# EAGLE board Power Board rev3 (EAGLE 8.1.0)
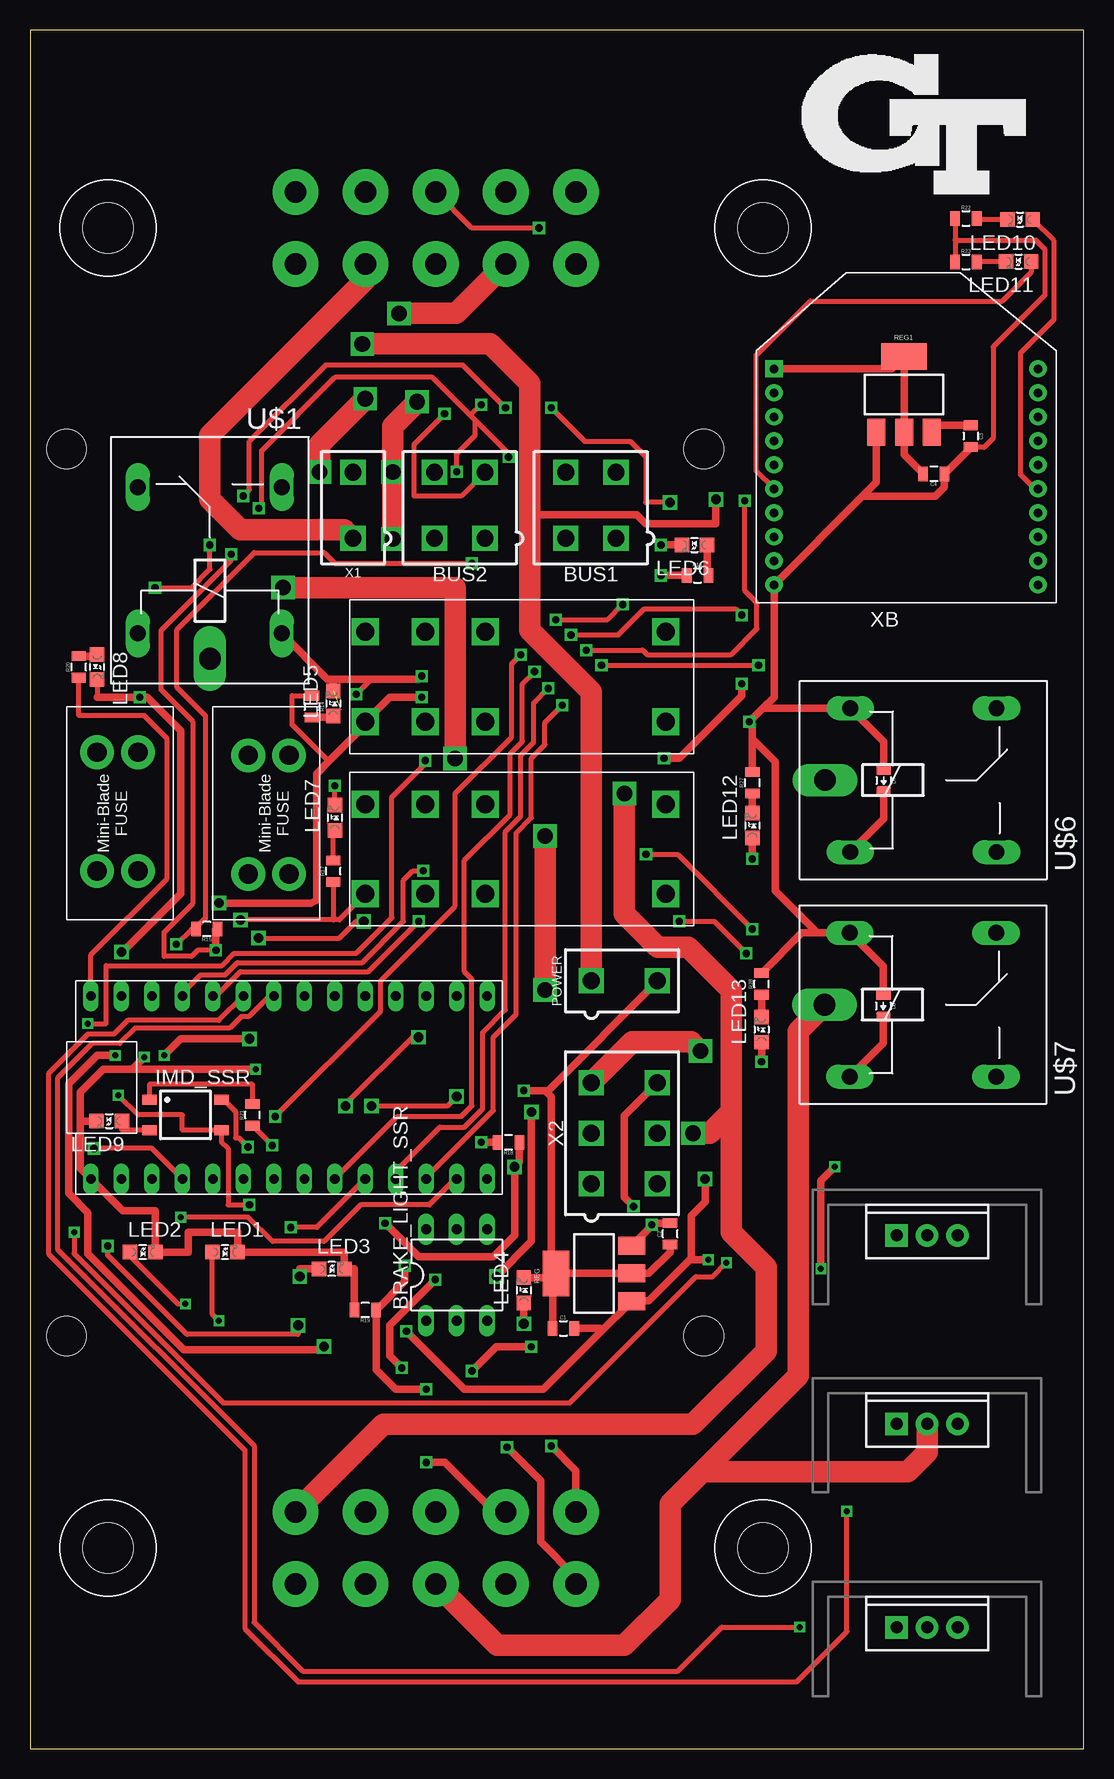
[diagram p0: board, top side]
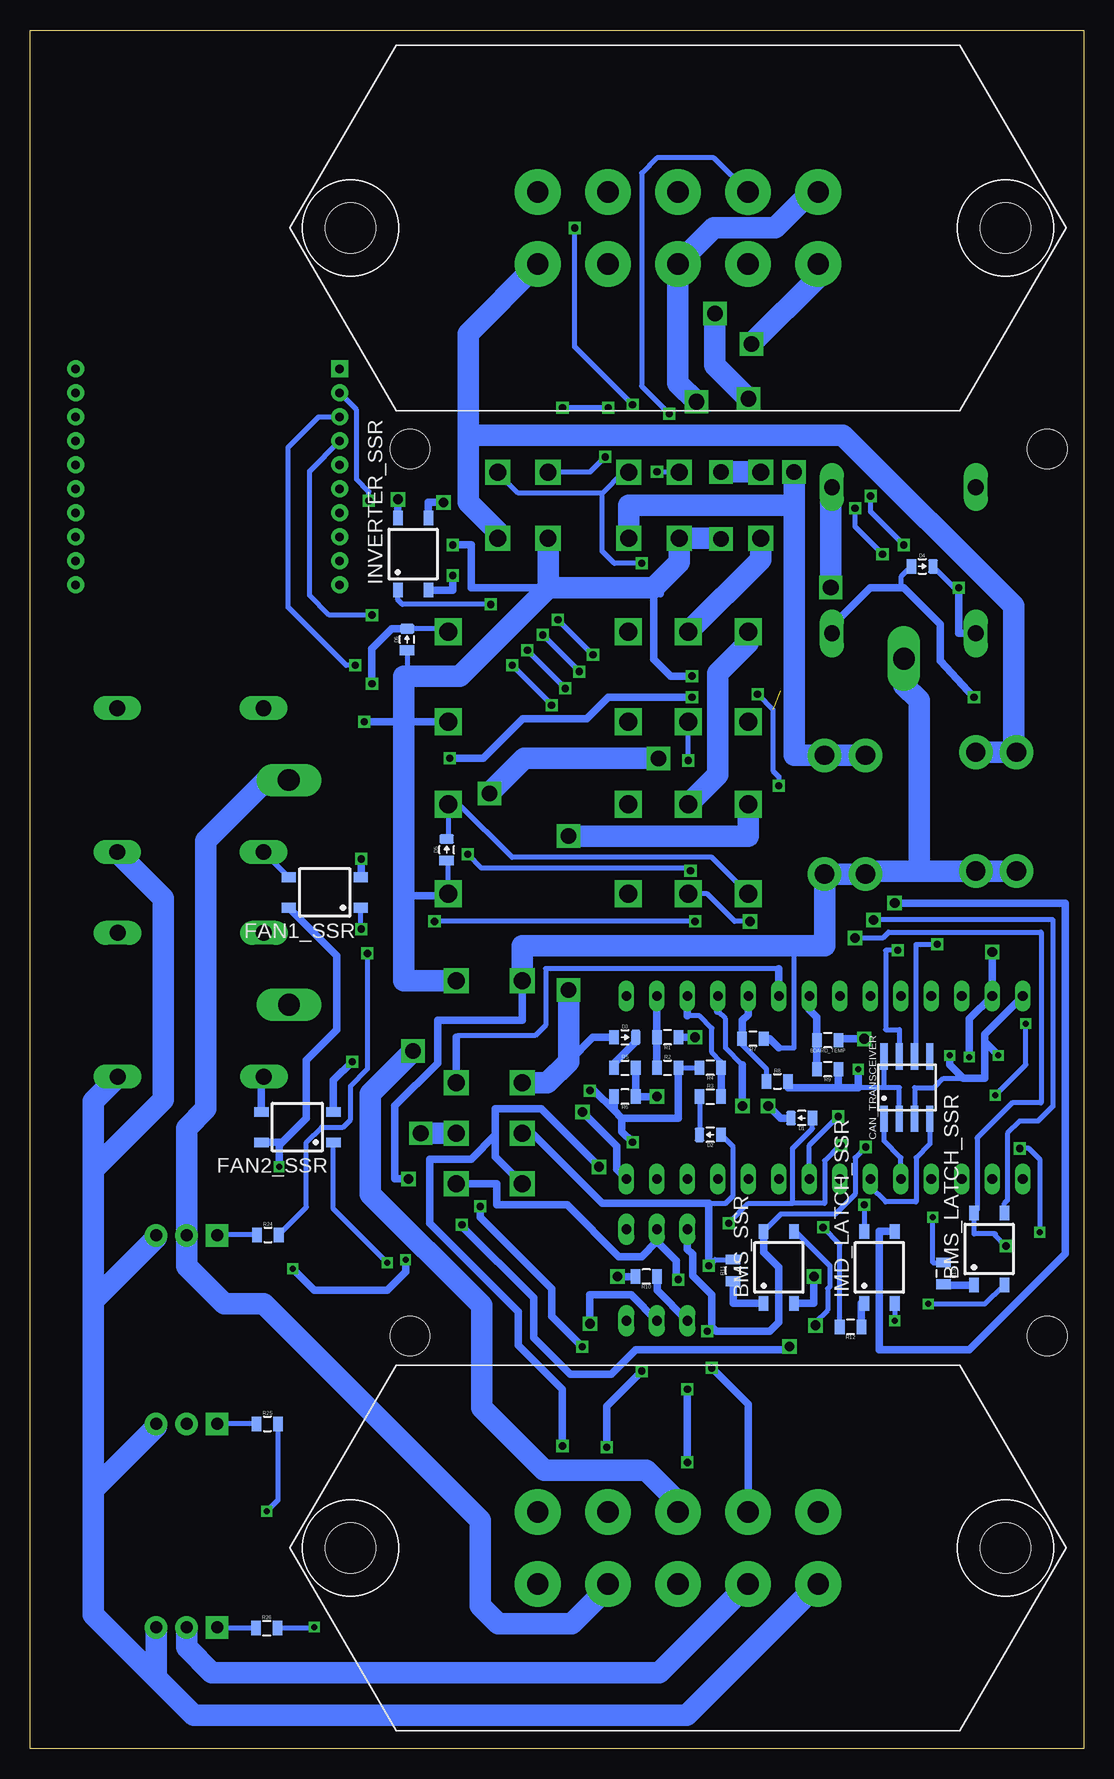
[diagram p1: board, bottom side, seen from below]

Size 87.81 x 143.25 mm. Coordinates in mm from the lower left corner, seen from the top.
Outline: 0,0 87.81,0 87.81,143.25 0,143.25 0,0
Copper layers (1*16): Top 0.035mm / dielectric 1.5mm / Bottom 0.035mm
Design rules "default *": minimum track width 10mil, minimum drill 12mil, track to track 8mil, track to pad 8mil, pad to pad 8mil, via to via 8mil, smd to smd 8mil, copper to edge 40mil, drill to drill 8mil, minimum pad ring 10mil, minimum via ring 8mil, stop-mask expansion 4mil, vias tented up to drill 0mil, thermal gap 10mil
Holes 3.3 mm at 3.05,108.33 56.13,108.33 3.05,34.42 56.13,34.42

## Footprints (pad centres in the part's own frame; a part is rotated, then mirrored left to right if it is on the bottom)
SOP04 = smd 0.8 x 1.2: 1 -1.27,-3; 2 1.27,-3; 3 1.27,3; 4 -1.27,3
0805 = smd 0.8 x 1.2: 1 -0.9,0; 2 0.9,0
DIL06 = drill 0.813 long: 1 -2.54,-3.81; 2 0,-3.81; 3 2.54,-3.81; 4 2.54,3.81; 5 0,3.81; 6 -2.54,3.81
MINIFIT_5566-4 = drill 1.4 square: 1 2.1,-2.75; 2 -2.1,-2.75; 3 2.1,2.75; 4 -2.1,2.75
SOIC-08 = smd 0.6 x 2.2: 1 -1.905,-2.6; 2 -0.635,-2.6; 3 0.635,-2.6; 4 1.905,-2.6; 5 1.905,2.6; 6 0.635,2.6; 7 -0.635,2.6; 8 -1.905,2.6
0805_D = smd 0.8 x 1.2: A -0.9,0; C 0.9,0
MINI-BLADE_FUSE_HOLDER = drill 1.613 pad 2.794: L1 0,3.404; L2 0,0; R1 9.906,3.404; R2 9.906,0
G2RL-2 = drill 1.5 square: 2 10.008,0; 3 5.004,0; 4 0,0; 5 0,7.493; 6 5.004,7.493; 7 10.008,7.493; COIL+ 25.019,0; COIL- 25.019,7.493
LED-805 = smd 1.2 x 1.2: A 0,-1.05; C 0,1.05
MINIFIT_5566-2 = drill 1.4 square: 1 0,-2.75; 2 0,2.75
SOT223 = smd 1.5 x 2.235: 1 -2.3,-3.15; 2 0,-3.15; 3 2.3,-3.15 | smd 3.8 x 2.2: 4 0,3.15
ZF112 = drill 1.321 long: 1 4.064,14.884; 2 4.064,2.896; O 16.256,14.884; S 16.256,2.896 | drill 1.803 long: P 1.956,8.89
TO-220-SINK = drill 1 pad 1.88 square: 1 -2.54,0 | drill 1 pad 1.88: 2 0,0; 3 2.54,0
TEENSY_3.2_SIMPLE = drill 0.8 long: 3.3V 16.51,29.21; A0 16.51,3.81; A1 16.51,6.35; A2 16.51,8.89; A3 16.51,11.43; A4 16.51,13.97; A5 16.51,16.51; A6 16.51,19.05; A7 16.51,21.59; A8 16.51,24.13; A9 16.51,26.67; AGND 16.51,31.75; D0(RX1) 1.27,31.75; D1(TX1) 1.27,29.21; D2 1.27,26.67; D3(CANTX) 1.27,24.13; D4(CANRX) 1.27,21.59; D5 1.27,19.05; D6 1.27,16.51; D7(RX3) 1.27,13.97; D8(TX3) 1.27,11.43; D9(RX2) 1.27,8.89; D10(TX2) 1.27,6.35; D11 1.27,3.81; D12 1.27,1.27; D13 16.51,1.27; GND 1.27,34.29; VIN 16.51,34.29
MINIFIT_5566-6 = drill 1.4 square: 1 4.2,-2.75; 2 0,-2.75; 3 -4.2,-2.75; 4 4.2,2.75; 5 0,2.75; 6 -4.2,2.75
MX150L_VERTICAL-10 = drill 1.778 pad 3.81: 1 -11.684,2.997; 2 -5.842,2.997; 3 0,2.997; 4 5.842,2.997; 5 11.684,2.997; 6 -11.684,-2.997; 7 -5.842,-2.997; 8 0,-2.997; 9 5.842,-2.997; 10 11.684,-2.997 | hole 4.191: -27.292,0; 27.292,0
XBEE = drill 0.7 pad 1.422 square: 1 -11,5.5 | drill 0.7 pad 1.422: 2 -11,3.5; 3 -11,1.5; 4 -11,-0.5; 5 -11,-2.5; 6 -11,-4.5; 7 -11,-6.5; 8 -11,-8.5; 9 -11,-10.5; 10 -11,-12.5; 11 11,-12.5; 12 11,-10.5; 13 11,-8.5; 14 11,-6.5; 15 11,-4.5; 16 11,-2.5; 17 11,-0.5; 18 11,1.5; 19 11,3.5; 20 11,5.5

## Placement (x,y rotation side)
BMS_LATCH_SSR  CPC1002N  [SOP04]  7.87,41.66 0 bottom
BMS_SSR  CPC1002N  [SOP04]  25.4,40.13 0 bottom
BOARD_TEMP  THERMISTOR_NCP21  [0805]  21.34,59.05 180 bottom
BRAKE_LIGHT_SSR  SOLID_STATE_RELAY_VO14642AT  [DIL06]  35.56,39.5 0 top
BUS1  CONNECTOR-4  [MINIFIT_5566-4]  46.74,103.63 0 top
BUS2  CONNECTOR-4  [MINIFIT_5566-4]  35.81,103.63 0 top
C1  .22uF  [0805]  44.45,35.05 0 top
C2  .1uF  [0805]  53.34,42.93 90 top
C3  1uF  [0805]  78.4,109.41 270 top
C4  1uF  [0805]  75.32,106.26 180 top
CAN_TRANSCEIVER  MCP2551  [SOIC-08]  14.73,55.12 0 bottom
D1  DIODE0805  [0805_D]  23.5,52.58 180 bottom
D2  DIODE0805  [0805_D]  31.11,51.18 180 bottom
D3  DIODE0805  [0805_D]  38.23,59.31 0 bottom
D4  DIODE0805  [0805_D]  13.46,98.55 0 bottom
D5  DIODE0805  [0805_D]  53.09,74.93 90 bottom
D6  DIODE0805  [0805_D]  56.39,92.46 90 bottom
D7  DIODE0805  [0805_D]  71.14,80.7 270 top
D8  DIODE0805  [0805_D]  71.11,61.92 270 top
FAN1_SSR  CPC1002N  [SOP04]  63.25,71.37 90 bottom
FAN2_SSR  CPC1002N  [SOP04]  65.53,51.82 90 bottom
FUSE_BUS_1  5A  [MINI-BLADE_FUSE_HOLDER]  5.59,83.06 270 top
FUSE_BUS_2  5A  [MINI-BLADE_FUSE_HOLDER]  21.59,72.9 90 top
IMD_LATCH_SSR  CPC1002N  [SOP04]  17.02,40.13 0 bottom
IMD_SHUTDOWN  G2RL-2-DC12  [G2RL-2]  27.94,85.6 0 top
IMD_SHUTDOWN1  G2RL-2-DC12  [G2RL-2]  27.94,71.25 0 top
IMD_SSR  CPC1002N  [SOP04]  12.95,52.83 270 top
INVERTER_SSR  CPC1002N  [SOP04]  55.88,99.57 0 bottom
LED1  [LED-805]  16.26,41.4 270 top
LED2  [LED-805]  9.4,41.4 270 top
LED3  [LED-805]  25.15,40.01 270 top
LED4  [LED-805]  41.15,38.23 0 top
LED5  [LED-805]  25.27,87.12 0 top
LED6  [LED-805]  55.37,100.33 90 top
LED7  [LED-805]  25.4,77.6 0 top
LED8  [LED-805]  5.59,90.17 180 top
LED9  [LED-805]  6.6,52.32 90 top
LED10  [LED-805]  82.51,127.45 90 top
LED11  [LED-805]  82.39,123.94 90 top
LED12  [LED-805]  60.2,76.96 0 top
LED13  [LED-805]  60.96,59.94 0 top
POWER  CONNECTOR-2  [MINIFIT_5566-2]  49.53,64.01 270 top
R1  43k  [0805]  34.67,59.31 180 bottom
R2  12k  [0805]  34.67,56.77 0 bottom
R3  43k  [0805]  31.11,54.36 0 bottom
R4  12k  [0805]  31.11,56.77 180 bottom
R5  43k  [0805]  38.23,56.77 0 bottom
R6  12k  [0805]  38.23,54.36 180 bottom
R7  43k  [0805]  27.56,59.18 180 bottom
R8  12k  [0805]  25.53,55.63 0 bottom
R9  10k  [0805]  21.34,56.64 180 bottom
R10  100  [0805]  36.45,39.37 180 bottom
R11  100  [0805]  29.21,39.88 90 bottom
R12  100  [0805]  19.43,35.18 180 bottom
R13  100  [0805]  11.68,39.62 270 bottom
R14  820  [0805]  23.5,86.87 270 top
R15  120  [0805]  14.73,68.33 180 top
R16  100  [0805]  55.63,97.79 0 top
R17  820  [0805]  25.27,73.15 90 top
R18  2.2k  [0805]  39.88,50.55 180 top
R19  10k  [0805]  27.94,36.58 180 top
R20  270  [0805]  4.06,90.17 90 top
R21  680  [0805]  18.54,52.83 90 top
R22  [0805]  78,127.54 0 top
R23  [0805]  78,123.93 0 top
R24  [0805]  67.98,42.84 0 bottom
R25  [0805]  68.03,27.09 0 bottom
R26  [0805]  68.08,10.07 0 bottom
R27  [0805]  60.2,80.52 90 top
R28  [0805]  60.96,63.75 90 top
REG  5V  [SOT223]  46.99,39.62 90 top
REG1  TLV1117LV33  [SOT223]  72.84,112.88 0 top
U$1  G5LE  [ZF112]  23.88,88.9 90 top
U$2  N-CHANNEL_MOSFETGENERIC  [TO-220-SINK]  74.76,42.79 0 top
U$3  TEENSY_3.2_SIMPLE  [TEENSY_3.2_SIMPLE]  39.37,46.23 90 top
U$4  N-CHANNEL_MOSFETGENERIC  [TO-220-SINK]  74.76,27.09 0 top
U$5  N-CHANNEL_MOSFETGENERIC  [TO-220-SINK]  74.76,10.13 0 top
U$6  G5LE  [ZF112]  64.29,71.85 0 top
U$7  G5LE  [ZF112]  64.25,53.13 0 top
X1  CONNECTOR-2  [MINIFIT_5566-2]  26.92,103.63 0 top
X2  CONNECTOR-6  [MINIFIT_5566-6]  49.53,51.31 270 top
X3  CONNECTOR-10MX150L_VERTICAL-10  [MX150L_VERTICAL-10]  33.81,16.75 0 bottom
X4  CONNECTOR-10MX150L_VERTICAL-10  [MX150L_VERTICAL-10]  33.81,126.75 180 bottom
XB  XBEE  [XBEE]  73,109.51 0 top

## Library data of the parts
BMS_LATCH_SSR BMS_SSR BOARD_TEMP BRAKE_LIGHT_SSR C1-C4 CAN_TRANSCEIVER D1-D8 FAN1_SSR FAN2_SSR FUSE_BUS_1 FUSE_BUS_2 IMD_LATCH_SSR IMD_SHUTDOWN IMD_SHUTDOWN1 IMD_SSR INVERTER_SSR LED1-LED13 R1-R28 REG REG1 U$1 U$3 U$6 U$7 X3 X4 XB = HyTechDevices
BUS1 BUS2 = HyTechDevices; OC_FARNELL: unknown; OC_NEWARK: unknown
POWER X1 = HyTechDevices; OC_FARNELL: 1822072; OC_NEWARK: unknown
U$2 U$4 U$5 = HyTechDevices; _EXTERNAL_: 1
X2 = HyTechDevices; MPN: 95566-61002; OC_FARNELL: unknown; OC_NEWARK: 22K8620

## Nets
12V_F1: BUS1.1 FUSE_BUS_1.L1 FUSE_BUS_1.L2 X4.5
12V_F2: BUS2.1 FUSE_BUS_2.R1 FUSE_BUS_2.R2 X4.4
12VSUPPLY_READ: R7.2 R8.1 U$3.A3
+5V: BOARD_TEMP.1 C2.2 CAN_TRANSCEIVER.3 R20.1 REG.3 U$3.VIN
+12V: BMS_SSR.4 BRAKE_LIGHT_SSR.6 C1.2 FAN1_SSR.4 FAN2_SSR.4 FUSE_BUS_1.R1 FUSE_BUS_1.R2 FUSE_BUS_2.L1 FUSE_BUS_2.L2 IMD_SSR.4 INVERTER_SSR.4 POWER.1 R7.1 REG.1 U$1.P X4.1
BMS_COIL_PWR: BMS_LATCH_SSR.3 D5.C IMD_SHUTDOWN1.4 IMD_SHUTDOWN1.COIL- R17.1
BMS_OK: D2.A R11.2 R19.1 X2.2 X3.2
BMS_OK_READ: R3.2 R4.1 U$3.A1
BMS_PWR_STEP: BMS_LATCH_SSR.4 BMS_SSR.3 IMD_SHUTDOWN1.3
BRAKE_LIGHT: BRAKE_LIGHT_SSR.5 X2.4 X3.4
CANH: BUS1.4 BUS2.4 CAN_TRANSCEIVER.7 R15.1 X4.8
CANL: BUS1.3 BUS2.3 CAN_TRANSCEIVER.6 R15.2 X4.7
FAN1-: U$2.2 U$6.P X3.7
FAN2-: U$4.2 U$7.P X3.8
FAN3-: U$5.2 X3.9
GND: BUS1.2 BUS2.2 C1.1 C2.1 C3.2 C4.1 CAN_TRANSCEIVER.2 CAN_TRANSCEIVER.8 D4.A D5.A D6.A D7.A D8.A IMD_SHUTDOWN1.COIL+ IMD_SHUTDOWN.COIL+ LED1.C LED2.C LED3.C LED4.C LED5.C LED6.C LED7.C LED8.C LED9.C POWER.2 R2.2 R4.2 R6.2 R8.2 R9.1 R18.2 R19.2 R22.1 R23.1 R27.2 R28.2 REG1.1 REG.2 REG.4 U$1.2 U$3.AGND U$3.GND U$6.1 U$7.1 X1.2 X4.3 X4.6 XB.10
GND1: U$2.3 U$4.3 U$5.3 U$6.S U$7.S X3.10
GPIO: U$3.A4 X2.6 X3.6
INVERTER_SUPPLY: U$1.S X2.5 X3.5
N$1: IMD_LATCH_SSR.2 LED1.A
N$2: CAN_TRANSCEIVER.4 U$3.D4(CANRX)
N$3: CAN_TRANSCEIVER.1 U$3.D3(CANTX)
N$4: D7.C FAN1_SSR.3 U$6.2
N$5: IMD_LATCH_SSR.1 R12.1
N$6: D6.C IMD_LATCH_SSR.3 IMD_SHUTDOWN.4 IMD_SHUTDOWN.COIL- R14.1
N$7: BRAKE_LIGHT_SSR.2 LED4.A
N$8: R12.2 U$3.D8(TX3)
N$9: BMS_SSR.2 LED3.A
N$10: LED10.A XB.15
N$11: LED10.C R22.2
N$12: BMS_LATCH_SSR.1 R13.2
N$13: R10.2 U$3.D12
N$14: R13.1 U$3.D11
N$15: BOARD_TEMP.2 R9.2 U$3.A5
N$16: BMS_LATCH_SSR.2 LED2.A
N$17: BRAKE_LIGHT_SSR.1 R10.1
N$18: BMS_SSR.1 R11.1
N$19: LED5.A R14.2
N$20: D8.C FAN2_SSR.3 U$7.2
N$21: INVERTER_SSR.1 U$3.D6
N$22: D1.C R1.1
N$23: D2.C R3.1
N$24: D3.C R5.1
N$25: LED11.A XB.6
N$26: D4.C INVERTER_SSR.3 U$1.1
N$27: INVERTER_SSR.2 R16.1
N$28: LED6.A R16.2
N$29: LED8.A R20.2
N$30: IMD_LATCH_SSR.4 IMD_SHUTDOWN.3 IMD_SSR.3
N$31: IMD_SSR.1 R21.2
N$32: LED7.A R17.2
N$33: LED11.C R23.2
N$34: IMD_SSR.2 LED9.A
N$35: C3.1 REG1.3
N$36: LED13.C R28.1
N$37: LED12.C R27.1
N$38: FAN1_SSR.2 LED12.A
N$39: R24.1 U$2.1
N$40: R25.1 U$4.1
N$41: R26.1 U$5.1
N$42: FAN2_SSR.2 LED13.A
OKHS: D1.A R18.1 R21.1 X2.1 X3.1
OKHS_READ: R1.2 R2.1 U$3.A0
PWM_CTRL1: R24.2 U$3.A8
PWM_CTRL2: R25.2 U$3.A7
PWM_CTRL3: R26.2 U$3.A6
RELAY_CTRL1: FAN1_SSR.1 U$3.A9
RELAY_CTRL2: FAN2_SSR.1 U$3.D2
SHUTDOWN_A: IMD_SHUTDOWN1.6 IMD_SHUTDOWN.5
SHUTDOWN_B: D3.A IMD_SHUTDOWN1.5 X2.3 X3.3
SHUTDOWN_OUT_READ: R5.2 R6.1 U$3.A2
SHUTDOWN_POWER: IMD_SHUTDOWN.6 X1.1 X4.2
VCC: C4.2 REG1.2 REG1.4 XB.1
XB8: U$3.D7(RX3) XB.4
XBDI: U$3.D10(TX2) XB.3
XBDO: U$3.D9(RX2) XB.2

## Tracks (layer width: path | path; a pad name or v marks a point on that pad's centre or on a via)
12V_F1
  Bottom 1.778: FUSE_BUS_1.L2 5.84,83.06 | 5.84,83.06 FUSE_BUS_1.L1 | BUS1.1 48.84,101.41 51.31,103.89 51.31,109.47 | 5.84,83.06 5.84,95.25 20.07,109.47 51.31,109.47 | 51.31,109.47 51.31,117.94 X4.5
12V_F2  (via drill 1.3)
  Top 1.778: v24.13,106.43 24.13,108.7 v27.94,112.52 | v30.73,119.63 35.53,119.63 X4.4
  Bottom 1.778: BUS2.1 37.91,103.63 24.13,103.63 v24.13,106.43 24.13,82.8 FUSE_BUS_2.R2 FUSE_BUS_2.R1 | v27.94,112.52 30.73,115.31 v30.73,119.63
12VSUPPLY_READ
  Bottom 0.406: 26.42,55.64 26.42,56.64 28.45,58.67 28.45,59.17 R7.2
  Bottom 0.61: U$3.A3 27.95,62.74 27.95,61.2 28.45,60.71 28.45,59.19 R7.2 | 26.42,55.64 R8.1
+5V  (via drill 0.5, 0.6, 0.8)
  Top 0.406: U$3.VIN 5.08,66.17 11.43,72.52 11.43,84.2 9.53,86.11 4.06,86.11 R20.1
  Top 0.61: 50.52,42.3 REG.3 | v24.51,33.53 24.26,33.27 12.83,33.27 4.83,41.27 4.83,44.7 3.24,46.29 3.24,55.44 5.59,57.79 v7.11,57.79 | v11.18,57.79 12.57,59.18 v18.29,59.18 | REG.3 50.17,41.92 | C2.2 51.95,43.83 v51.82,43.69 51.82,43.6 REG.3
  Bottom 0.406: CAN_TRANSCEIVER.3 14.1,55.12 12.45,55.12 11.68,55.88 8.89,55.88
  Bottom 0.61: v24.51,33.53 24.77,33.27 37.34,33.27 39.37,31.24 42.8,31.24 45.84,34.29 45.84,37.59 51.82,43.57 v51.82,43.69 | BOARD_TEMP.1 20.44,59.18 v18.29,59.18 | v11.18,57.79 11.18,57.02 10.03,55.88 8.89,55.88 8.26,55.88 8.26,58.93 | U$3.VIN 8.26,59.56 8.26,58.93 | v7.11,57.79 8.26,58.93
+12V  (via drill 0.5, 0.6, 0.8, 1.3)
  Top 0.406: IMD_SSR.4 16.13,54.1 17.14,53.09 17.14,50.93 17.4,50.93 v18.16,50.16
  Top 0.61: 47.5,34.68 REG.1 50.15,37.34 51.56,37.34 55.12,40.89 | C1.2 47.5,35.05 47.5,34.68 | v57.15,104.14 57.15,102.11 51.31,102.11 50.55,102.87 41.91,102.87 41.66,103.12 | 55.12,40.89 55.12,44.45 56.26,45.59 v56.26,47.5 | 55.12,40.89 55.24,40.77 v56.52,40.77 | v65.91,40.01 65.91,47.37 v67.06,48.51 | v31.37,34.8 36.2,29.97 42.79,29.97 47.5,34.68
  Top 1.778: POWER.1 46.78,88.09 41.66,93.22 41.66,103.12 41.66,113.79 38.35,117.09 v27.69,117.09
  Bottom 0.406: 24.13,66.93 24.13,58.42 25.4,58.42 | v18.16,50.16 19.05,49.28 19.05,46.23 20.7,44.58 25.23,44.58 BMS_SSR.4
  Bottom 0.61: INVERTER_SSR.4 v57.15,104.14 | BRAKE_LIGHT_SSR.6 33.02,41.66 32.58,41.21 32.58,39.43 30.99,37.85 30.99,35.18 | BMS_SSR.4 26.67,41.4 25.4,40.13 25.4,35.56 26.16,34.8 30.61,34.8 30.99,35.18 | POWER.1 46.78,60.71 53.85,60.71 53.85,57.15 57.4,53.59 57.4,47.5 v56.26,47.5 | R7.1 26.16,59.18 25.4,58.42 | 66.8,50.55 FAN2_SSR.4 | 66.8,50.55 64.77,52.58 64.77,57.4 62.23,59.94 62.23,66.09 FAN1_SSR.4 | 30.99,35.18 v31.37,34.8 | v56.52,40.77 56.52,39.75 58.04,38.23 64.14,38.23 v65.91,40.01 | v67.06,48.51 67.06,50.29 66.8,50.55
  Bottom 1.778: FUSE_BUS_1.R2 FUSE_BUS_1.R1 13.46,73.15 | 13.46,73.15 18.19,73.15 FUSE_BUS_2.L1 FUSE_BUS_2.L2 21.59,66.93 24.13,66.93 46.78,66.93 POWER.1 | U$1.P 14.99,88.65 13.72,87.38 13.72,73.41 13.46,73.15 | v27.69,117.09 22.13,122.65 X4.1
BMS_COIL_PWR  (via drill 0.8)
  Top 0.406: 25.27,69.09 v17.53,69.09 | R17.1 25.27,69.09 | IMD_SHUTDOWN1.4 25.78,69.09 25.27,69.09
  Bottom 0.406: BMS_LATCH_SSR.3 6.6,45.47 6.35,45.72 6.35,51.31 5.33,52.32 3.81,52.32 2.54,53.59 2.54,69.09 v17.53,69.09 | D5.C 52.96,75.96 IMD_SHUTDOWN1.COIL- 52.07,78.74 47.62,74.3 30.99,74.3 IMD_SHUTDOWN1.4
BMS_OK  (via drill 0.6)
  Top 0.61: v33.02,29.97 30.48,29.97 28.84,31.61 R19.1 31.24,38.98 v31.24,40.26 | X3.2 38.67,19.75 34.54,23.88 v33.02,23.88
  Bottom 0.406: D2.A 29.21,50.18 29.21,46.1 29.84,45.47 31.24,45.47 | v31.24,40.26 30.72,40.78 R11.2
  Bottom 0.61: X2.2 45.97,51.31 40.13,45.47 31.24,45.47 v31.24,40.26 | v33.02,29.97 v33.02,23.88
BMS_OK_READ
  Bottom 0.406: R4.1 30.23,56.77 30.23,57.28 30.99,58.04 30.99,60.07 32,61.09 33.02,61.09
  Bottom 0.61: R3.2 R4.1 | 33.02,61.09 U$3.A1
BMS_PWR_STEP  (via drill 0.6, 0.8)
  Top 0.406: v22.35,35.31 22.35,34.54 13.08,34.54 6.48,41.15 v6.48,41.91 | v19.05,67.56 25.78,67.56 27.18,68.96 v27.81,68.96
  Bottom 0.406: v22.35,35.31 22.35,35.56 21.34,36.58 21.34,38.35 21.16,38.53 21.16,40.26 24.08,43.18 BMS_SSR.3 | IMD_SHUTDOWN1.3 31.37,71.25 29.08,68.96 v27.81,68.96 | v19.05,67.56 16.76,67.56 16.26,68.07 3.56,68.07 3.56,53.85 5.97,53.85 8.89,50.93 8.89,44.91 BMS_LATCH_SSR.4 9.14,42.93 7.37,42.93 7.37,42.8 v6.48,41.91
BRAKE_LIGHT  (via drill 0.6)
  Top 0.61: v30.99,31.75 29.97,32.77 29.97,35.31 v33.78,39.12
  Bottom 0.61: 35.56,42.29 36.83,41.02 38.73,41.02 43.05,45.34 48.9,45.34 48.9,47.11 X2.4 | BRAKE_LIGHT_SSR.5 35.56,42.29 | v30.99,31.75 27.97,28.73 X3.4 | 35.56,42.29 33.97,40.7 33.97,39.31 v33.78,39.12
CANH  (via drill 0.6)
  Top 0.406: R15.1 15.49,68.33 | v35.56,106.43 35.56,107.95 37.08,109.47 37.08,110.74 | v16.76,99.57 16.76,99.06 10.92,93.22 10.92,88.27 13.59,85.6 13.59,70.48 11.18,68.07 11.18,66.04 13.46,66.04 13.97,66.55 v15.49,66.55 | v19.05,103.4 19.3,103.66 19.3,108.2 25.4,114.3 33.53,114.3 36.7,111.12 | 37.08,110.74 36.7,111.12 | 37.08,110.74 39.88,107.95 v39.88,107.67 | X4.8 36.83,126.73 42.4,126.73 v42.42,126.75 | v37.59,112.01 36.7,111.12
  Top 0.61: 15.49,68.33 v15.49,66.55
  Bottom 0.406: v15.49,66.55 16.51,66.55 16.51,59.94 15.37,59.94 CAN_TRANSCEIVER.7 | BUS1.4 44.64,106.43 41.12,106.43 v39.88,107.67 | v35.56,106.43 33.71,106.43 BUS2.4 | v16.76,99.57 19.05,101.85 v19.05,103.4 | v37.59,112.01 42.42,116.84 v42.42,126.75
CANL  (via drill 0.6)
  Top 0.406: BUS2.3 35.93,104.39 32,104.39 32,108.71 34.54,111.25 v34.54,111.28 | v36.83,98.81 25.4,98.81 24.51,99.69 18.67,99.69 12.19,93.22 12.19,88.52 14.61,86.11 14.61,69.22 13.97,68.58 13.97,68.33 R15.2 13.46,68.33 v12.19,67.06
  Bottom 0.406: CAN_TRANSCEIVER.6 13.97,57.72 13.97,67.06 v12.19,67.06 | 40.13,104.65 38.4,106.38 BUS2.3 | v36.83,98.81 39.12,98.81 40.13,99.82 40.13,104.65 | 40.13,104.65 47.1,104.65 BUS1.3 | X4.7 30.81,132.59 35.56,132.59 36.83,131.32 36.83,113.56 v34.54,111.28
FAN1-
  Bottom 1.778: U$6.P 68.11,80.74 73.15,75.69 73.15,53.34 74.76,51.73 U$2.2 74.76,40.21 71.63,37.08 68.33,37.08 50.29,19.05 50.29,11.94 48.77,10.41 42.67,10.41 39.65,13.43 X3.7
FAN2-
  Top 1.778: U$7.P 64.01,59.82 64.01,31.11 56.01,23.11 | X3.8 38.93,8.64 49.53,8.64 53.34,12.45 53.34,20.45 56.01,23.11 | U$4.2 74.76,24.72 73.15,23.11 56.01,23.11
FAN3-
  Bottom 1.778: U$5.2 74.76,8.46 72.64,6.35 35.37,6.35 X3.9
GND  (via drill 0.5, 0.6, 0.8, 1.3)  (1 unrouted)
  Top 0.406: LED7.C v25.4,80.26 | LED8.C 5.59,87.63 | 28.45,89.15 v27.18,87.88 | R22.1 77.1,125.73 | 77.1,125.73 R23.1 | C3.2 78.45,108.46 79.5,108.46 80.26,109.22 80.26,116.84 84.58,121.16 84.58,124.97 83.82,125.73 77.1,125.73
  Top 0.61: LED6.C v52.58,100.33 | REG.4 REG.2 51.56,39.62 53.34,41.4 C2.1 | 17.27,41.66 LED1.C | 5.59,87.63 v9.14,87.63 9.78,87.63 12.57,84.84 12.57,71.25 7.75,66.42 v7.62,66.42 | 38.61,50.55 R18.2 v37.59,50.55 | 4.19,52.32 LED9.C | 25.27,89.15 32.38,89.15 v32.64,89.41 | 25.27,89.15 LED5.C | C1.1 43.55,39.62 REG.4 | U$1.2 24.79,89.15 25.27,89.15 | 42.93,54.86 43.18,54.86 52.28,63.96 POWER.2 | C3.2 78.4,108.43 C4.1 76.2,106.24 76.2,105.16 75.42,104.37 69.36,104.37 | 69.36,104.37 XB.10 62,87.65 61.08,86.73 | 69.36,104.37 70.54,105.55 REG1.1 | 65.59,68.02 U$7.1 71.11,65.22 D8.A | D7.A 71.14,83.94 U$6.1 61.08,86.73 | 65.59,68.02 62.1,71.5 62.1,82.28 60.2,84.19 | R27.2 60.2,84.19 | R28.2 64.32,68.02 65.59,68.02 | LED1.C 17.31,43.05 13.21,43.05 13.21,41.4 LED2.C 10.45,44.83 7.75,44.83 U$3.GND 4.19,48.39 4.19,52.32 | 8.51,56.64 v18.8,56.64 | v9.53,57.66 8.51,56.64 | 8.51,56.64 6.1,56.64 4.19,54.74 4.19,52.32 | 42.93,54.86 43.43,54.36 43.43,41.27 43.84,40.87 REG.4 | REG.4 43.49,39.28 LED4.C | R19.2 27.04,40.01 LED3.C 26.2,41.4 LED1.C | 42.93,54.86 v41.15,54.86 | 60.2,84.19 60.2,85.34 v59.94,85.6 61.08,86.73
  Top 1.778: v30.23,100.84 v30.23,106.43 30.23,110.24 v32.26,112.27
  Bottom 0.406: CAN_TRANSCEIVER.2 15.37,55.12 16.64,55.12 | 16.64,55.12 CAN_TRANSCEIVER.8 | 16.64,55.12 20.57,55.12 | R2.2 R4.2 | D4.A 15.24,97.67 15.24,96.77 | D5.A 52.96,73.9 IMD_SHUTDOWN1.COIL+ 52.96,71.12 | D6.A 56.39,89.66 56.64,89.41 | v27.18,87.88 25.91,86.61 25.91,81.53 25.4,81.03 v25.4,80.26
  Bottom 0.61: v52.58,100.33 51.05,100.33 51.05,96.77 44.64,96.77 | POWER.2 52.2,64.01 | v7.62,66.42 U$3.AGND 9.53,60.83 v9.53,57.66 | R9.1 20.44,55.12 | R2.2 33.77,52.58 38.48,52.58 | R8.2 24.63,55.12 20.57,55.12 20.44,55.12 | 39.12,53.21 38.48,52.58 | 39.12,53.21 39.12,54.34 R6.2 | v9.14,87.63 11.94,90.68 11.94,93.73 14.99,96.77 15.24,96.77 17.78,96.77 20.98,93.57 U$1.2 | IMD_SHUTDOWN.COIL+ 56.64,85.6 v59.94,85.6 | 56.64,71.12 52.96,71.12 | 35.31,96.27 35.81,96.77 35.81,90.81 34.42,89.41 v32.64,89.41 | 20.44,55.12 18.8,55.12 v18.8,56.64 | v41.15,54.86 40.77,54.86 39.12,53.21 | v37.59,50.55 38.48,51.44 38.48,52.58
  Bottom 1.778: POWER.2 56.64,64.01 56.64,71.12 56.64,85.6 56.64,89.41 52,89.41 44.64,96.77 | 44.64,96.77 35.81,96.77 33.71,98.87 BUS2.2 30.23,100.88 v30.23,100.84 | BUS1.2 44.64,96.77 | v30.23,106.43 26.92,106.43 X1.2 | v32.26,112.27 33.81,113.82 X4.3 30.81,126.75 25.71,126.75 22.71,129.75 X4.6
GND1
  Bottom 1.778: U$6.S 76.71,70.91 76.71,54.1 82.55,48.26 | U$7.S 82.55,53.99 82.55,48.26 | 82.55,37.34 82.55,48.26 | 82.55,37.34 82.55,21.59 | 22.09,13.72 X3.10 33.09,2.79 74.17,2.79 77.3,5.92 | U$2.3 77.3,42.59 82.55,37.34 | U$4.3 77.3,26.84 82.55,21.59 | 82.55,21.59 82.55,11.18 77.3,5.92 | U$5.3 77.3,5.92
GPIO  (via drill 0.6)
  Top 0.61: X3.6 45.49,14.32 42.55,17.27 42.55,22.35 v39.75,25.15 | v36.83,31.5 38.86,33.53 v41.78,33.53 | v50.29,45.21 49.53,45.97 49.53,52.76 X2.6
  Bottom 0.406: 25.4,65.02 44.83,65.02 44.83,60.33 45.72,59.44 52.15,59.44 52.28,59.31
  Bottom 0.61: U$3.A4 25.4,65.02 | 52.28,59.31 X2.6 | v39.75,25.15 39.75,28.57 v36.83,31.5 | v41.78,33.53 44.32,36.07 44.32,38.35 50.29,44.32 v50.29,45.21
INVERTER_SUPPLY  (via drill 1.3)
  Top 1.778: v55.24,51.31 56.52,51.31 56.64,51.44 56.64,51.31 58.42,53.09 | v35.43,82.55 35.43,96.77 v21.08,96.77 | v49.53,79.63 49.53,69.6 52.32,66.8 54.86,66.8 58.42,63.25 58.42,53.09 | 58.42,53.09 58.42,43.05 61.34,40.13 61.34,33.15 55.24,27.05 29.43,27.05 X3.5
  Bottom 1.778: X2.5 v55.24,51.31 | v21.08,96.77 21.08,105.05 U$1.S | v35.43,82.55 46.61,82.55 v49.53,79.63
N$1  (via drill 0.5)
  Top 0.406: v15.75,35.69 15.21,36.23 LED1.A
  Top 0.61: LED1.A 15.24,41.66
  Bottom 0.406: IMD_LATCH_SSR.2 v15.75,35.69
N$2
  Bottom 0.406: CAN_TRANSCEIVER.4 12.83,50.42 13.97,49.28 13.97,45.59 16.51,45.59 17.78,46.86 U$3.D4(CANRX)
N$3
  Bottom 0.406: U$3.D3(CANTX) 15.24,49.28 16.64,50.67 CAN_TRANSCEIVER.1
N$4
  Top 0.61: U$6.2 71.14,77.53 D7.C
  Bottom 0.406: FAN1_SSR.3 U$6.2
N$5
  Bottom 0.61: IMD_LATCH_SSR.1 18.53,37.13 R12.1
N$6  (via drill 0.6, 0.8)
  Top 0.406: R14.1 21.84,87.77 21.84,85.34 24.89,82.3
  Top 0.61: v15.75,70.48 23.38,70.48 23.88,70.73 23.88,81.28 24.89,82.3 27.94,85.34 IMD_SHUTDOWN.4 29.97,87.63 v32.64,87.63 | v52.83,82.55 54.1,82.55 59.31,87.76 v59.31,88.77
  Bottom 0.406: D6.C 53.22,93.36 IMD_SHUTDOWN.COIL-
  Bottom 0.61: v15.75,70.48 1.52,70.48 1.52,41.27 9.53,33.27 17.02,33.27 17.02,43.13 IMD_LATCH_SSR.3 | 52.96,92.96 IMD_SHUTDOWN.COIL- | v32.64,87.63 39.62,87.63 41.4,85.85 46.74,85.85 50.04,82.55 v52.83,82.55 | D6.C 57.65,93.36 59.31,91.69 v59.31,88.77
N$7  (via drill 0.8)
  Top 0.61: v41.15,35.43 LED4.A
  Bottom 0.61: v41.15,35.43 41.15,37.85 37.72,37.85 BRAKE_LIGHT_SSR.2
N$8  (via drill 0.6)
  Top 0.406: U$3.D8(TX3) 26.54,46.09 26.53,46.09 23.9,43.46 v21.72,43.46
  Bottom 0.406: R12.2 20.32,42.06 v21.72,43.46
N$9  (via drill 0.8)
  Top 0.61: v22.48,39.37 22.48,40.01 LED3.A
  Bottom 0.61: BMS_SSR.2 22.48,37.13 v22.48,39.37
N$10
  Top 0.406: XB.15 83.71,105.01 82.55,106.17 82.55,116.33 85.34,119.13 85.34,125.67 LED10.A
N$11
  Top 0.406: LED10.C 78.99,127.45 R22.2
N$12
  Bottom 0.61: BMS_LATCH_SSR.1 11.68,38.66 R13.2
N$13  (via drill 0.8)
  Top 0.61: v38.86,39.37 41.78,42.29 v41.78,53.09
  Bottom 0.61: R10.2 v38.86,39.37 | v41.78,53.09 38.92,50.23 38.92,48.32 U$3.D12
N$14  (via drill 0.5)
  Top 0.406: v12.57,44.32 18.16,44.32 20.19,42.29 24.51,42.29 27.56,45.34 33.27,45.34 35.43,47.5 U$3.D11
  Bottom 0.406: v12.57,44.32 12.57,40.52 R13.1
N$15
  Bottom 0.61: R9.2 BOARD_TEMP.2 22.24,60.97 22.86,61.59 U$3.A5
N$16  (via drill 0.5)
  Top 0.406: LED2.A 8.35,41.05 12.32,37.08 v12.95,37.08
  Bottom 0.406: BMS_LATCH_SSR.2 6.68,38.66 8.26,37.08 v12.95,37.08
N$17
  Bottom 0.61: BRAKE_LIGHT_SSR.1 35.55,38.22 R10.1
N$18
  Bottom 0.61: BMS_SSR.1 29.21,37.13 R11.1
N$19
  Top 0.61: R14.2 25.27,85.97 LED5.A
N$20
  Top 0.61: U$7.2 71.11,58.82 D8.C
  Bottom 0.61: FAN2_SSR.3 68.53,55.81 U$7.2
N$21  (via drill 0.6)
  Top 0.406: v20.45,52.7 29.21,61.47 29.21,64.01 35.43,70.23 35.43,79.63 40.13,84.33 40.13,90.42 v40.89,91.19 | v43.81,94.11 48.13,94.11 v49.4,95.38
  Bottom 0.406: v20.45,52.7 22.86,50.29 U$3.D6 | v40.89,91.19 v43.81,94.11 | v49.4,95.38 56.77,95.38 57.15,95.76 INVERTER_SSR.1
  Bottom 0.61: INVERTER_SSR.1 57.15,96.52
N$22  (via drill 0.8)
  Top 0.406: v26.29,53.59 26.29,53.72 31.88,59.31 32,59.31
  Top 0.61: 32,59.31 v32.38,59.31
  Bottom 0.61: v32.38,59.31 R1.1 | D1.C 25.26,52.57 v26.29,53.59
N$23
  Bottom 0.406: R3.1 D2.C
N$24
  Bottom 0.61: R5.1 39.13,57.14 37.34,58.93 37.34,59.3 D3.C
N$25
  Top 0.406: LED11.A 83.44,123.06 81.03,120.65 65.02,120.65 60.52,116.14 60.52,106.49 XB.6
N$26  (via drill 0.6, 0.8)
  Top 0.406: v53.34,103.89 51.31,103.89 51.31,107.7 50.04,108.97 46.23,108.97 v43.43,111.76 | v10.41,96.77 13.46,96.77 14.99,98.3 v14.99,100.33 | v17.76,104.41 18.29,104.94 18.29,108.97 24.64,115.32 36.07,115.32 v39.62,111.76
  Bottom 0.406: D4.C 10.41,96.4 10.41,96.27 | v14.99,100.33 17.76,103.1 v17.76,104.41 | v39.62,111.76 v43.43,111.76
  Bottom 0.61: U$1.1 10.41,92.96 10.41,96.27 v10.41,96.77 | v53.34,103.89 54.61,103.89 INVERTER_SSR.3
N$27  (via drill 0.6)
  Top 0.61: v52.58,97.79 R16.1
  Bottom 0.61: INVERTER_SSR.2 52.58,96.57 v52.58,97.79
N$28
  Top 0.61: R16.2 56.42,97.79 LED6.A
N$29
  Top 0.61: LED8.A 5.59,91.07 R20.2
N$30  (via drill 0.5, 0.6)
  Top 0.406: v18.29,45.34 16.51,45.34 16.51,50.04 15.95,50.59 IMD_SSR.3 12.7,51.56 12.7,52.83 9.02,52.83 v7.37,54.48 | v4.83,60.45 6.35,60.45 6.35,65.28 16,65.28 17.02,66.29 27.18,66.29 30.16,69.28 30.16,79.31 32.94,82.09 v32.94,82.37
  Bottom 0.406: v18.29,45.34 IMD_LATCH_SSR.4 | v7.37,54.48 4.83,57.02 v4.83,60.45 | v32.94,82.37 IMD_SHUTDOWN.3
N$31
  Top 0.406: R21.2 18.54,55.37 9.95,55.37 IMD_SSR.1
N$32
  Top 0.406: R17.2 25.27,76.8 LED7.A
N$33
  Top 0.406: LED11.C R23.2
N$34
  Top 0.406: IMD_SSR.2 7.65,51.56 LED9.A
N$35
  Top 0.61: REG1.3 75.72,110.31 C3.1
N$36
  Top 0.61: R28.1 LED13.C
N$37
  Top 0.61: R27.1 LED12.C
N$38  (via drill 0.6)
  Top 0.61: LED12.A v60.2,74.17
  Bottom 0.61: v60.2,74.17 60.2,72.69 FAN1_SSR.2
N$39
  Bottom 0.406: R24.1 72.17,42.84 U$2.1
N$40
  Bottom 0.406: R25.1 U$4.1
N$41
  Bottom 0.406: R26.1 72.16,10.07 U$5.1
N$42  (via drill 0.6)
  Top 0.61: LED13.A v60.96,57.28
  Bottom 0.61: v60.96,57.28 62.53,55.7 FAN2_SSR.2
OKHS  (via drill 0.6, 0.8)
  Top 0.406: v20.19,50.29 v20.18,50.29 R21.1
  Top 0.61: R18.1 40.78,48.91 v40.39,48.51 40.39,42.8 38.61,41.02 32.38,41.02 v29.59,43.81 | X3.1 45.49,23.19 v43.43,25.25
  Bottom 0.406: 24.26,45.47 21.59,45.47 21.59,49.02 20.32,50.29 v20.19,50.29 | v29.59,43.81 27.94,45.47 24.26,45.47 | D1.A 22.61,52.57 22.61,51.69 24.26,50.04 24.26,45.47
  Bottom 0.61: v40.39,48.51 45.21,53.34 49.02,53.34 49.02,51.18 | v43.43,25.25 43.43,29.97 47.12,33.66 47.12,36.45 54.48,43.81 54.48,49.15 51.05,49.15 49.02,51.18 | X2.1 49.02,49.35 49.02,51.18
OKHS_READ
  Bottom 0.61: U$3.A0 R1.2 R2.1
PWM_CTRL1  (via drill 0.6)
  Top 0.406: U$3.A8 15.49,62.74 17.53,64.77 28.19,64.77 v32.38,68.96 | v54.1,68.96 57.02,68.96 v59.69,66.29
  Bottom 0.406: v32.38,68.96 v54.1,68.96 | v59.69,66.29 59.69,56.64 61.09,55.25 61.09,52.45 61.72,51.82 63.5,51.82 64.77,50.55 64.77,45.15 R24.2
PWM_CTRL2  (via drill 0.5)
  Top 0.406: U$3.A7 15.75,60.71 8.13,60.71 6.99,59.56 4.83,59.56 1.52,56.26 1.52,41.27 17.91,24.89 17.91,10.03 22.35,5.59 63.88,5.59 68.07,9.78 v68.07,19.81
  Bottom 0.406: v68.07,19.81 67.13,20.76 R25.2
PWM_CTRL3  (via drill 0.5)
  Top 0.406: U$3.A6 19.93,62.74 18.22,61.02 17.59,61.02 16.64,60.07 8.76,60.07 7.49,58.8 5.21,58.8 2.29,55.88 2.29,41.66 18.67,25.27 18.67,10.54 22.73,6.48 53.98,6.48 57.66,10.16 v64.14,10.16
  Bottom 0.406: v64.14,10.16 64.22,10.07 R26.2
RELAY_CTRL1  (via drill 0.6)
  Top 0.406: U$3.A9 12.7,62.99 14.22,64.52 16.26,64.52 17.27,65.53 27.69,65.53 31.11,68.96 31.11,72.39 31.9,73.18 v32.77,73.18 | v51.33,74.55 53.98,74.55 v60.2,68.33
  Bottom 0.406: v60.2,68.33 60.25,68.37 FAN1_SSR.1 | v51.33,74.55 50.19,73.41 32.99,73.41 v32.77,73.18
RELAY_CTRL2  (via drill 0.5, 0.6)
  Top 0.406: U$3.D2 10.16,50.04 v5.33,50.04 | v3.68,43.05 3.68,41.28 16.13,28.83 44.96,28.83 55.5,39.37 56.9,39.37 v58.04,40.51
  Bottom 0.406: v5.33,50.04 4.57,50.04 3.68,49.15 v3.68,43.06 v3.68,43.05 | FAN2_SSR.1 62.53,45.01 v58.04,40.51
SHUTDOWN_A
  Bottom 1.778: IMD_SHUTDOWN.5 27.94,92.2 30.48,89.66 30.48,81.2 IMD_SHUTDOWN1.6
SHUTDOWN_B  (via drill 1.3)
  Top 1.778: X2.3 50.2,58.93 55.12,58.93 v55.88,58.17 | v42.93,63.24 v42.93,76.07
  Bottom 0.61: 40.51,59.31 D3.A 40.9,59.31 42.93,57.29
  Bottom 1.778: IMD_SHUTDOWN1.5 27.94,76.07 v42.93,76.07 | X2.3 44.7,55.51 42.93,57.29 v42.93,63.24 | v55.88,58.17 59.44,54.61 59.44,46.23 50.16,36.96 50.16,28.45 44.96,23.24 36.45,23.24 33.81,20.6 X3.3
SHUTDOWN_OUT_READ  (via drill 0.8)
  Top 0.406: v28.45,53.59 34.8,53.59 v35.56,54.36
  Bottom 0.406: 28.45,57.02 29.84,58.42 29.84,60.83 30.48,61.47
  Bottom 0.61: R5.2 R6.1 v35.56,54.36 | 28.45,57.02 v28.45,53.59 | 30.48,61.47 U$3.A2
SHUTDOWN_POWER
  Top 1.778: X1.1 26.21,101.6 17.53,101.6 14.99,104.14 14.99,109.47 27.97,122.46 X4.2
  Bottom 1.778: IMD_SHUTDOWN.6 26.92,99.11 X1.1
VCC
  Top 0.61: XB.1 71.82,115.01 REG1.4 REG1.2 72.84,107.85 C4.2
XB8  (via drill 0.6)
  Top 0.406: U$3.D7(RX3) 30.61,52.7 35.94,52.7 36.83,53.59 36.83,64.13 36.2,64.77 36.2,74.04 40.01,77.85 40.01,82.93 41.02,83.95 41.02,88.76 v42.04,89.78 | v45.09,92.84 49.02,92.84 51.18,95 58.8,95 v59.31,94.49
  Bottom 0.406: v42.04,89.78 42.04,89.8 v45.09,92.84 | v59.31,94.49 62.87,94.49 64.52,96.14 64.52,106.5 XB.4
XBDI  (via drill 0.6)
  Top 0.406: U$3.D10(TX2) 33.02,47.62 38.61,53.21 38.61,59.31 40.51,61.21 40.51,76.33 41.78,77.6 41.78,82.58 42.9,83.69 42.9,85.53 v44.34,86.97 | v47.62,90.3 v60.71,90.3
  Bottom 0.406: v44.34,86.97 44.34,87.02 v47.62,90.3 | v60.71,90.3 61.47,90.3 66.29,95.12 66.29,108.46 63.75,111 62.01,111 XB.3
XBDO  (via drill 0.6)
  Top 0.406: U$3.D9(RX2) 30.48,48.13 34.16,51.82 36.2,51.82 37.72,53.34 37.72,59.69 39.62,61.59 39.62,76.45 40.89,77.72 40.89,82.8 41.97,83.88 41.97,87.16 v43.19,88.38 | v46.35,91.57 51.05,91.57 51.44,91.19 58.42,91.19 60.58,93.34 60.58,95.5 59.56,96.52 v59.56,104.01
  Bottom 0.406: v43.19,88.38 43.19,88.41 v46.35,91.57 | v59.56,104.01 59.56,104.78 60.58,105.79 60.58,111.59 XB.2

## Text on the board
tDocu: HyTech 2017 | BMS LATCH | IMD LATCH | BMS | power_board_rev3